# Altium PCB Test.PcbDoc (part 2 of 3)
Units mil, origin at the board's own origin, x right, y up, seen from the top; angles counter-clockwise.
Board outline 6000 x 4000 mil, 2 copper layers (Top Layer, Bottom Layer); 135 components, 102 nets, 575 pads, 1 vias.
Unrouted connection lines stored in the file: 317.
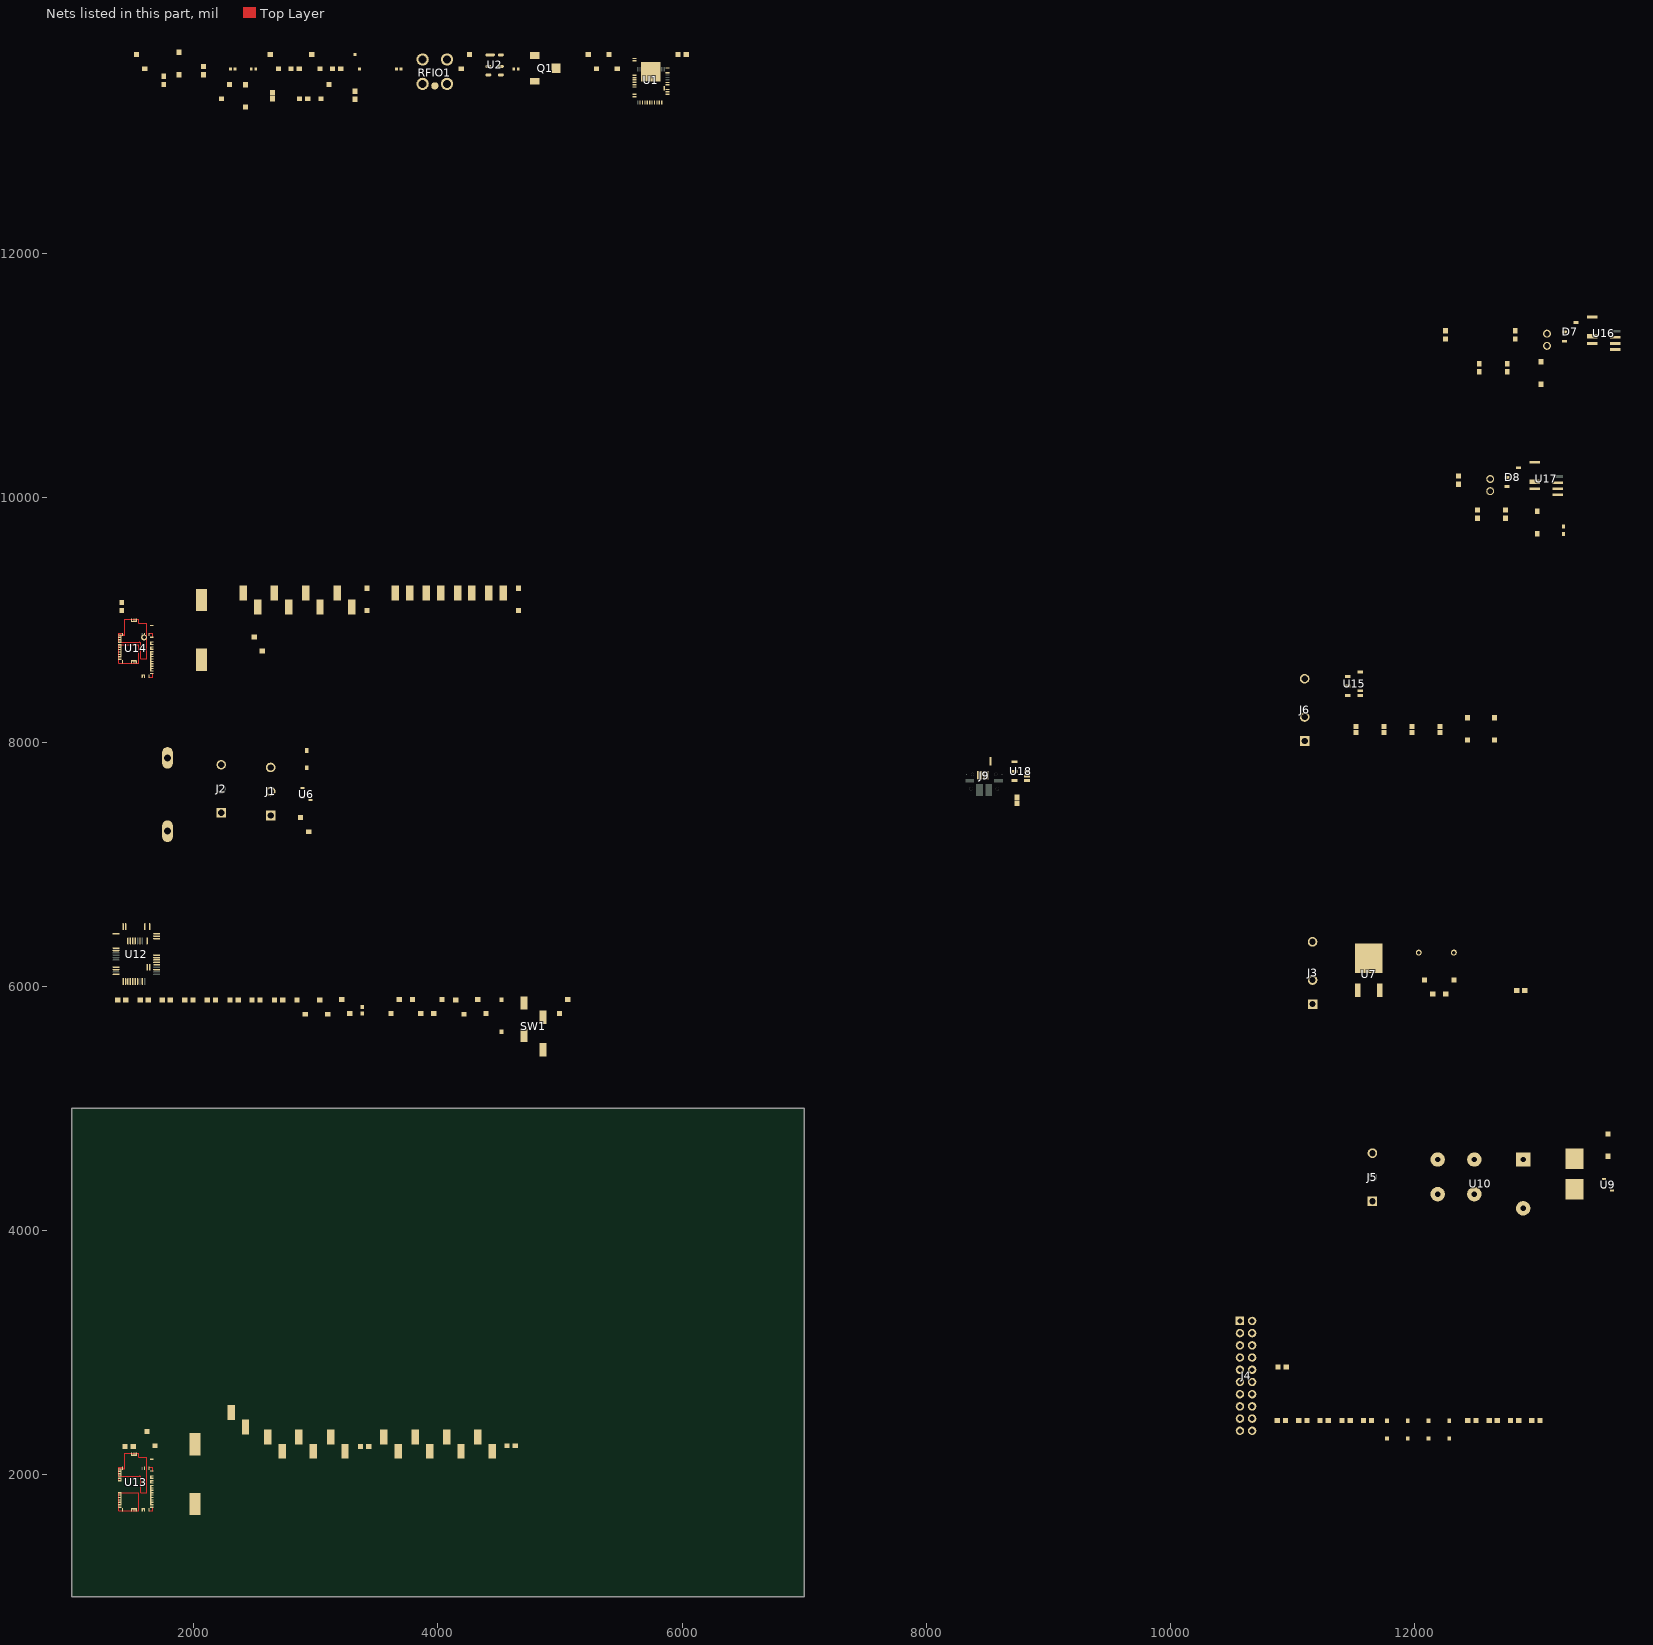
[diagram p2: the nets of this part, all layers, seen from the top]

## Part data
C1 C2 C14 C20 C21 C22 C23: Capacitance=1uF, Case/Package=0603, Case Code (Metric)=1608, Dielectric=X5R, Manufacturer=Murata, Manufacturer Part Number=GRM188R61A105KA61J, Max Operating Temperature=85°C, Min Operating Temperature=-55°C, Package Quantity=1, Supplier Part Number 1=GRM188R61A105KA61J-ND, Tolerance=10%, Voltage Rating=10V, Case Code (Imperial)=0603, ComponentLink1Description=https://datasheet.ciiva.com/6270/product-6270752.pdf, ComponentLink1URL=https://datasheet.ciiva.com/6270/product-6270752.pdf, ComponentLink2Description=https://datasheet.ciiva.com/6270/partnumbering-e-01-6270748.pdf, ComponentLink2URL=https://datasheet.ciiva.com/6270/partnumbering-e-01-6270748.pdf, ComponentLink3Description=https://datasheet.ciiva.com/6270/partnumbering-e-01-6270750.pdf, ComponentLink3URL=https://datasheet.ciiva.com/6270/partnumbering-e-01-6270750.pdf, Depth=0.8mm, Height=0.8mm, Length=1.6mm, Mount="Surface Mount", Packaging="Tape and Reel", Pricing 1="30000=0.0118 (USD)", Radiation Hardening=No, REACH SVHC="No SVHC", Stock 1=0, Supplier 1=Digi-Key, Termination=SMD/SMT, Thickness=0.035inch, Voltage Rating (DC)=10V, Width=0.031inch
C3: Capacitance=220nF, Case/Package=0603, Case Code (Metric)=1608, Dielectric=X7R, Manufacturer=Murata, Manufacturer Part Number=GRM188R71E224KA88D, Max Operating Temperature=125°C, Min Operating Temperature=-55°C, Package Quantity=1, Supplier Part Number 1=490-3290-2-ND, Tolerance=10%, Voltage=50V, Voltage Rating=25V, Case Code (Imperial)=0603, ComponentLink1Description=https://datasheet.ciiva.com/5411/product-5411362.pdf, ComponentLink1URL=https://datasheet.ciiva.com/5411/product-5411362.pdf, ComponentLink2Description=https://datasheet.ciiva.com/11786/0900766b807a1cab-11786308.pdf, ComponentLink2URL=https://datasheet.ciiva.com/11786/0900766b807a1cab-11786308.pdf, ComponentLink3Description=https://datasheet.ciiva.com/14116/nmgrm-data-en-14116629.pdf, ComponentLink3URL=https://datasheet.ciiva.com/14116/nmgrm-data-en-14116629.pdf, ComponentLink4Description=https://datasheet.ciiva.com/3777/1531grm188r71e224ka8823-3777688.pdf, ComponentLink4URL=https://datasheet.ciiva.com/3777/1531grm188r71e224ka8823-3777688.pdf, ComponentLink5Description=https://datasheet.ciiva.com/6068/1784408-6068393.pdf, ComponentLink5URL=https://datasheet.ciiva.com/6068/1784408-6068393.pdf, ComponentLink6Description=https://datasheet.ciiva.com/16425/product-16425866.pdf, ComponentLink6URL=https://datasheet.ciiva.com/16425/product-16425866.pdf, ComponentLink7Description=https://datasheet.ciiva.com/22703/1784408-22703338.pdf, ComponentLink7URL=https://datasheet.ciiva.com/22703/1784408-22703338.pdf, ComponentLink8Description=https://datasheet.ciiva.com/133/grm188r71e224ka88-01-133883.pdf, ComponentLink8URL=https://datasheet.ciiva.com/133/grm188r71e224ka88-01-133883.pdf, ComponentLink9Description=https://datasheet.ciiva.com/133/grm188r71e224ka88-01-133884.pdf, ComponentLink9URL=https://datasheet.ciiva.com/133/grm188r71e224ka88-01-133884.pdf, ComponentLink10Description=https://datasheet.ciiva.com/7937/1784408-7937645.pdf, ComponentLink10URL=https://datasheet.ciiva.com/7937/1784408-7937645.pdf, ComponentLink11Description=https://datasheet.ciiva.com/48436/nmgrm-data-en-48436687.pdf, ComponentLink11URL=https://datasheet.ciiva.com/48436/nmgrm-data-en-48436687.pdf, ComponentLink12Description=https://datasheet.ciiva.com/29202/451619-da-01-en-vs-kondensator-0603-29202002.pdf, ComponentLink12URL=https://datasheet.ciiva.com/29202/451619-da-01-en-vs-kondensator-0603-29202002.pdf, Depth=0.8mm, Height=0.8mm, Lead Free="Lead Free", Length=1.6mm, Material=Ceramic, Mount="Surface Mount", Number of Pins=2, Packaging="Tape and Reel", Pricing 1="4000=0.02634 (USD)", Radiation Hardening=No, REACH SVHC="No SVHC", Stock 1=0, Supplier 1=Digi-Key, Termination=SMD/SMT, Thickness=0.035inch, Voltage Rating (DC)=25V, Width=0.8mm
C5: Capacitance=22pF, Case/Package=0603, Case Code (Metric)=1608, Dielectric=C0G, Dielectric Material=Ceramic, Insulation Resistance=10GR, Manufacturer=Murata, Manufacturer Part Number=GRM1885C1H220JA01D, Max Operating Temperature=125°C, Min Operating Temperature=-55°C, Package Quantity=1, Supplier Part Number 1=490-1411-2-ND, Temperature Coefficient=30ppm/°C, Tolerance=10%, Voltage=50V, Case Code (Imperial)=0603, ComponentLink1Description=https://datasheet.ciiva.com/131/product-131760.pdf, ComponentLink1URL=https://datasheet.ciiva.com/131/product-131760.pdf, ComponentLink2Description=https://datasheet.ciiva.com/131/partnumbering-e-01-131761.pdf, ComponentLink2URL=https://datasheet.ciiva.com/131/partnumbering-e-01-131761.pdf, ComponentLink3Description=https://datasheet.ciiva.com/14116/grmseries-tc-hitype-eng-14116853.pdf, ComponentLink3URL=https://datasheet.ciiva.com/14116/grmseries-tc-hitype-eng-14116853.pdf, ComponentLink4Description=https://datasheet.ciiva.com/3776/1156grm1885c1h220ja0123-3776984.pdf, ComponentLink4URL=https://datasheet.ciiva.com/3776/1156grm1885c1h220ja0123-3776984.pdf, ComponentLink5Description=https://datasheet.ciiva.com/14116/grmseries-tc-hitype-eng-14116826.pdf, ComponentLink5URL=https://datasheet.ciiva.com/14116/grmseries-tc-hitype-eng-14116826.pdf, ComponentLink6Description=https://datasheet.ciiva.com/11786/0900766b807a1cab-11786398.pdf, ComponentLink6URL=https://datasheet.ciiva.com/11786/0900766b807a1cab-11786398.pdf, ComponentLink7Description=https://datasheet.ciiva.com/131/partnumbering-e-01-131759.pdf, ComponentLink7URL=https://datasheet.ciiva.com/131/partnumbering-e-01-131759.pdf, Depth=0.8mm, Height=0.8mm, Lead Free="Lead Free", Length=1.6mm, Material=Ceramic, Mount="Surface Mount", Number of Pins=2, Packaging="Tape and Reel", Pricing 1="4000=0.01466 (USD)", Radiation Hardening=No, REACH SVHC="No SVHC", Stock 1=0, Supplier 1=Digi-Key, Termination=SMD/SMT, Thickness=0.035inch, Voltage Rating=50V, Voltage Rating (DC)=50V, Width=0.031inch
C6: Capacitance=1.8pF, Case/Package=0603, Case Code (Metric)=1608, Dielectric=C0G, Manufacturer=Murata, Manufacturer Part Number=GRM1885C1H1R8CA01D, Max Operating Temperature=125°C, Min Operating Temperature=-55°C, Package Quantity=4000, Supplier Part Number 1=GRM1885C1H1R8CA01D-ND, Voltage=50V, Case Code (Imperial)=0603, ComponentLink1Description=https://datasheet.ciiva.com/15381/product-15381873.pdf, ComponentLink1URL=https://datasheet.ciiva.com/15381/product-15381873.pdf, ComponentLink2Description=https://datasheet.ciiva.com/29538/partnumbering-e-01-29538301.pdf, ComponentLink2URL=https://datasheet.ciiva.com/29538/partnumbering-e-01-29538301.pdf, ComponentLink3Description=https://datasheet.ciiva.com/41860/partnumbering-e-01-41860766.pdf, ComponentLink3URL=https://datasheet.ciiva.com/41860/partnumbering-e-01-41860766.pdf, Depth=0.8mm, Height=0.8mm, Lead Free="Lead Free", Lead Pitch=0.5mm, Length=1.6mm, Mount="Surface Mount", Packaging="Tape and Reel", Pricing 1="12000=0.0088 (USD)", REACH SVHC="No SVHC", Stock 1=0, Supplier 1=Digi-Key, Termination=SMD/SMT, Thickness=0.035inch, Voltage Rating=50V, Voltage Rating (DC)=50V, Width=0.8mm
C9: Capacitance=680pF, Case/Package=0603, Case Code (Metric)=1608, Dielectric=C0G, Dielectric Material=Ceramic, Insulation Resistance=10GR, Manufacturer=Murata, Manufacturer Part Number=GRM1885C1H681JA01D, Max Operating Temperature=125°C, Min Operating Temperature=-55°C, Package Quantity=1, Supplier Part Number 1=490-1447-2-ND, Temperature Coefficient=30ppm/°C, Tolerance=5%, Voltage=50V, Case Code (Imperial)=0603, ComponentLink1Description=https://datasheet.ciiva.com/132/product-132816.pdf, ComponentLink1URL=https://datasheet.ciiva.com/132/product-132816.pdf, ComponentLink2Description=https://datasheet.ciiva.com/18102/getdatasheetpartid-74199-18102533.pdf, ComponentLink2URL=https://datasheet.ciiva.com/18102/getdatasheetpartid-74199-18102533.pdf, ComponentLink3Description=https://datasheet.ciiva.com/11787/0900766b807a1cab-11787610.pdf, ComponentLink3URL=https://datasheet.ciiva.com/11787/0900766b807a1cab-11787610.pdf, ComponentLink4Description=https://datasheet.ciiva.com/5427/product-5427052.pdf, ComponentLink4URL=https://datasheet.ciiva.com/5427/product-5427052.pdf, ComponentLink5Description=https://datasheet.ciiva.com/16356/product-16356044.pdf, ComponentLink5URL=https://datasheet.ciiva.com/16356/product-16356044.pdf, ComponentLink6Description=https://datasheet.ciiva.com/132/partnumbering-e-01-132814.pdf, ComponentLink6URL=https://datasheet.ciiva.com/132/partnumbering-e-01-132814.pdf, ComponentLink7Description=https://datasheet.ciiva.com/6068/4360-6068366.pdf, ComponentLink7URL=https://datasheet.ciiva.com/6068/4360-6068366.pdf, ComponentLink8Description=https://datasheet.ciiva.com/132/partnumbering-e-01-132815.pdf, ComponentLink8URL=https://datasheet.ciiva.com/132/partnumbering-e-01-132815.pdf, ComponentLink9Description=https://datasheet.ciiva.com/29202/451105-da-01-en-vs-kondensator-0603-29202593.pdf, ComponentLink9URL=https://datasheet.ciiva.com/29202/451105-da-01-en-vs-kondensator-0603-29202593.pdf, Depth=0.8mm, Height=0.8mm, Lead Free="Lead Free", Length=1.6mm, Material=Ceramic, Mount="Surface Mount", Number of Pins=2, Packaging="Tape and Reel", Pricing 1="4000=0.02204 (USD)", Radiation Hardening=No, REACH SVHC="No SVHC", Stock 1=0, Supplier 1=Digi-Key, Termination=SMD/SMT, Thickness=0.035inch, Voltage Rating=50V, Voltage Rating (DC)=50V, Width=0.031inch
C10: Capacitance=47nF, Case/Package=0603, Case Code (Metric)=1608, Dielectric=X7R, Dielectric Material=Ceramic, Insulation Resistance=10GR, Manufacturer=Murata, Manufacturer Part Number=GRM188R71H473KA61D, Max Operating Temperature=125°C, Min Operating Temperature=-55°C, Package Quantity=1, Supplier Part Number 1=490-3287-6-ND, Tolerance=10%, Voltage=50V, Case Code (Imperial)=0603, ComponentLink1Description=https://datasheet.ciiva.com/7937/4360-7937672.pdf, ComponentLink1URL=https://datasheet.ciiva.com/7937/4360-7937672.pdf, ComponentLink2Description=https://datasheet.ciiva.com/14116/nmgrm-data-en-14116600.pdf, ComponentLink2URL=https://datasheet.ciiva.com/14116/nmgrm-data-en-14116600.pdf, ComponentLink3Description=https://datasheet.ciiva.com/7937/4360-7937673.pdf, ComponentLink3URL=https://datasheet.ciiva.com/7937/4360-7937673.pdf, ComponentLink4Description=https://datasheet.ciiva.com/48436/nmgrm-data-en-48436665.pdf, ComponentLink4URL=https://datasheet.ciiva.com/48436/nmgrm-data-en-48436665.pdf, ComponentLink5Description=https://datasheet.ciiva.com/7937/4360-7937674.pdf, ComponentLink5URL=https://datasheet.ciiva.com/7937/4360-7937674.pdf, ComponentLink6Description=https://datasheet.ciiva.com/132/grm188r71h473ka61-01-132379.pdf, ComponentLink6URL=https://datasheet.ciiva.com/132/grm188r71h473ka61-01-132379.pdf, ComponentLink7Description=https://datasheet.ciiva.com/132/grm188r71h473ka61-01-132380.pdf, ComponentLink7URL=https://datasheet.ciiva.com/132/grm188r71h473ka61-01-132380.pdf, ComponentLink8Description=https://datasheet.ciiva.com/5427/product-5427340.pdf, ComponentLink8URL=https://datasheet.ciiva.com/5427/product-5427340.pdf, ComponentLink9Description=https://datasheet.ciiva.com/11786/0900766b807a1cab-11786316.pdf, ComponentLink9URL=https://datasheet.ciiva.com/11786/0900766b807a1cab-11786316.pdf, ComponentLink10Description=https://datasheet.ciiva.com/16393/product-16393388.pdf, ComponentLink10URL=https://datasheet.ciiva.com/16393/product-16393388.pdf, ComponentLink11Description=https://datasheet.ciiva.com/132/grm188r71h473ka61-01-132381.pdf, ComponentLink11URL=https://datasheet.ciiva.com/132/grm188r71h473ka61-01-132381.pdf, ComponentLink12Description=https://datasheet.ciiva.com/18101/getdatasheetpartid-38124-18101149.pdf, ComponentLink12URL=https://datasheet.ciiva.com/18101/getdatasheetpartid-38124-18101149.pdf, ComponentLink13Description=https://datasheet.ciiva.com/29201/451904-da-01-en-vs-kondensator-0603-29201838.pdf, ComponentLink13URL=https://datasheet.ciiva.com/29201/451904-da-01-en-vs-kondensator-0603-29201838.pdf, Depth=0.8mm, Height=0.8mm, Lead Free="Lead Free", Length=1.6mm, Material=Ceramic, Mount="Surface Mount", Number of Pins=2, Packaging="Tape and Reel", Pricing 1="1=0.16, 10=0.114, 100=0.0538, 500=0.0377, 1000=0.03122 (USD)", Radiation Hardening=No, REACH SVHC="No SVHC", Stock 1=943, Supplier 1=Digi-Key, Termination=SMD/SMT, Thickness=0.035inch, Voltage Rating=50V, Voltage Rating (DC)=50V, Width=0.031inch
C11 C13 C15 C16 C17 C18 C19 C45 C49 C51: Capacitance=100nF, Case/Package=0603, Case Code (Metric)=1608, Dielectric=X7R, Dielectric Material=Ceramic, Insulation Resistance=10GR, Manufacturer=Murata, Manufacturer Part Number=GRM188R71H104KA93D, Max Operating Temperature=125°C, Min Operating Temperature=-55°C, Package Quantity=1, Supplier Part Number 1=490-1519-6-ND, Tolerance=10%, Voltage=50V, Case Code (Imperial)=0603, ComponentLink1Description=https://datasheet.ciiva.com/19467/1857604-19467681.pdf, ComponentLink1URL=https://datasheet.ciiva.com/19467/1857604-19467681.pdf, ComponentLink2Description=https://datasheet.ciiva.com/28534/4360-28534245.pdf, ComponentLink2URL=https://datasheet.ciiva.com/28534/4360-28534245.pdf, ComponentLink3Description=https://datasheet.ciiva.com/26915/getdatasheetpartid-89095-26915384.pdf, ComponentLink3URL=https://datasheet.ciiva.com/26915/getdatasheetpartid-89095-26915384.pdf, ComponentLink4Description=https://datasheet.ciiva.com/131/partnumbering-e-01-131738.pdf, ComponentLink4URL=https://datasheet.ciiva.com/131/partnumbering-e-01-131738.pdf, ComponentLink5Description=https://datasheet.ciiva.com/7937/1747470-7937658.pdf, ComponentLink5URL=https://datasheet.ciiva.com/7937/1747470-7937658.pdf, ComponentLink6Description=https://datasheet.ciiva.com/14116/nmgrm-data-en-14116602.pdf, ComponentLink6URL=https://datasheet.ciiva.com/14116/nmgrm-data-en-14116602.pdf, ComponentLink7Description=https://datasheet.ciiva.com/131/partnumbering-e-01-131739.pdf, ComponentLink7URL=https://datasheet.ciiva.com/131/partnumbering-e-01-131739.pdf, ComponentLink8Description=https://datasheet.ciiva.com/7937/4360-7937659.pdf, ComponentLink8URL=https://datasheet.ciiva.com/7937/4360-7937659.pdf, ComponentLink9Description=https://datasheet.ciiva.com/48436/nmgrm-data-en-48436667.pdf, ComponentLink9URL=https://datasheet.ciiva.com/48436/nmgrm-data-en-48436667.pdf, ComponentLink10Description=https://datasheet.ciiva.com/131/partnumbering-e-01-131740.pdf, ComponentLink10URL=https://datasheet.ciiva.com/131/partnumbering-e-01-131740.pdf, ComponentLink11Description=https://datasheet.ciiva.com/11786/0900766b807a1cab-11786047.pdf, ComponentLink11URL=https://datasheet.ciiva.com/11786/0900766b807a1cab-11786047.pdf, ComponentLink12Description=https://datasheet.ciiva.com/29201/451744-da-01-en-vs-kondensator-0603-29201904.pdf, ComponentLink12URL=https://datasheet.ciiva.com/29201/451744-da-01-en-vs-kondensator-0603-29201904.pdf, Contact Plating=Tin,Matte, Depth=0.8mm, Height=0.8mm, Lead Free="Lead Free", Length=1.6mm, Material=Ceramic, Mount="Surface Mount", Number of Pins=2, Packaging="Tape and Reel", Pricing 1="1=0.12, 10=0.084, 100=0.0396, 500=0.02778, 1000=0.023 (USD)", Radiation Hardening=No, REACH SVHC="No SVHC", Stock 1=0, Supplier 1=Digi-Key, Termination=SMD/SMT, Thickness=0.035inch, Voltage Rating=50V, Voltage Rating (DC)=50V, Width=0.8mm
C12 C44: Capacitance=10nF, Case/Package=0603, Case Code (Metric)=1608, Dielectric=X7R, Dielectric Material=Ceramic, Insulation Resistance=10GR, Manufacturer=Murata, Manufacturer Part Number=GRM188R71H103KA01D, Max Operating Temperature=125°C, Min Operating Temperature=-55°C, Package Quantity=1, Supplier Part Number 1=490-1512-1-ND, Tolerance=10%, Voltage=50V, Case Code (Imperial)=0603, ComponentLink1Description=https://datasheet.ciiva.com/129/product-129872.pdf, ComponentLink1URL=https://datasheet.ciiva.com/129/product-129872.pdf, ComponentLink2Description=https://datasheet.ciiva.com/11786/0900766b8003061f-11786516.pdf, ComponentLink2URL=https://datasheet.ciiva.com/11786/0900766b8003061f-11786516.pdf, ComponentLink3Description=https://datasheet.ciiva.com/7937/4360-7937654.pdf, ComponentLink3URL=https://datasheet.ciiva.com/7937/4360-7937654.pdf, ComponentLink4Description=https://datasheet.ciiva.com/7937/1747461-7937655.pdf, ComponentLink4URL=https://datasheet.ciiva.com/7937/1747461-7937655.pdf, ComponentLink5Description=https://datasheet.ciiva.com/7937/1747461-7937656.pdf, ComponentLink5URL=https://datasheet.ciiva.com/7937/1747461-7937656.pdf, ComponentLink6Description=https://datasheet.ciiva.com/28534/1769893-28534235.pdf, ComponentLink6URL=https://datasheet.ciiva.com/28534/1769893-28534235.pdf, ComponentLink7Description=https://datasheet.ciiva.com/129/partnumbering-e-01-129870.pdf, ComponentLink7URL=https://datasheet.ciiva.com/129/partnumbering-e-01-129870.pdf, ComponentLink8Description=https://datasheet.ciiva.com/48428/nmgrm-data-en-48428590.pdf, ComponentLink8URL=https://datasheet.ciiva.com/48428/nmgrm-data-en-48428590.pdf, ComponentLink9Description=https://datasheet.ciiva.com/129/partnumbering-e-01-129871.pdf, ComponentLink9URL=https://datasheet.ciiva.com/129/partnumbering-e-01-129871.pdf, ComponentLink10Description=https://datasheet.ciiva.com/48428/nmgrm-data-en-48428591.pdf, ComponentLink10URL=https://datasheet.ciiva.com/48428/nmgrm-data-en-48428591.pdf, ComponentLink11Description=https://datasheet.ciiva.com/29202/451715-da-01-en-vs-kondensator-0603-29202047.pdf, ComponentLink11URL=https://datasheet.ciiva.com/29202/451715-da-01-en-vs-kondensator-0603-29202047.pdf, Depth=0.8mm, Height=0.8mm, Lead Free="Lead Free", Length=1.6mm, Material=Ceramic, Mount="Surface Mount", Number of Pins=2, Packaging="Tape and Reel", Pricing 1="1=0.1, 10=0.06, 100=0.0266, 500=0.019 (USD)", REACH SVHC=Unknown, Stock 1=0, Supplier 1=Digi-Key, Termination=SMD/SMT, Thickness=0.035inch, Voltage Rating=50V, Voltage Rating (DC)=50V, Width=0.031inch
C24 C34: Capacitance=100uF, Case/Package=Radial, ESR (Equivalent Series Resistance)=28mR, Leakage Current=50uA, Manufacturer=Panasonic, Manufacturer Part Number=EEH-ZA1H101P, Max Operating Temperature=105°C, Min Operating Temperature=-55°C, Package Quantity=500, Ripple Current=2A, Supplier Part Number 1=P15442TR-ND, Tolerance=20%, Voltage=50V, ComponentLink1Description=https://datasheet.ciiva.com/48541/eehza-eng-tds-48541031.pdf, ComponentLink1URL=https://datasheet.ciiva.com/48541/eehza-eng-tds-48541031.pdf, ComponentLink2Description=https://datasheet.ciiva.com/18524/aba0000ce136-18524922.pdf, ComponentLink2URL=https://datasheet.ciiva.com/18524/aba0000ce136-18524922.pdf, ComponentLink3Description=https://datasheet.ciiva.com/6134/1536543-6134363.pdf, ComponentLink3URL=https://datasheet.ciiva.com/6134/1536543-6134363.pdf, ComponentLink4Description=https://datasheet.ciiva.com/7794/1536543-7794235.pdf, ComponentLink4URL=https://datasheet.ciiva.com/7794/1536543-7794235.pdf, ComponentLink5Description=https://datasheet.ciiva.com/18524/aba0000ce136-18524923.pdf, ComponentLink5URL=https://datasheet.ciiva.com/18524/aba0000ce136-18524923.pdf, ComponentLink6Description=https://datasheet.ciiva.com/30178/86aba0000ce136-30178699.pdf, ComponentLink6URL=https://datasheet.ciiva.com/30178/86aba0000ce136-30178699.pdf, ComponentLink7Description=https://datasheet.ciiva.com/14595/70256916-14595260.pdf, ComponentLink7URL=https://datasheet.ciiva.com/14595/70256916-14595260.pdf, ComponentLink8Description=https://datasheet.ciiva.com/18524/aba0000ce136-18524924.pdf, ComponentLink8URL=https://datasheet.ciiva.com/18524/aba0000ce136-18524924.pdf, ComponentLink9Description=https://datasheet.ciiva.com/28691/1536543-28691421.pdf, ComponentLink9URL=https://datasheet.ciiva.com/28691/1536543-28691421.pdf, ComponentLink10Description=https://datasheet.ciiva.com/22730/1536543-22730558.pdf, ComponentLink10URL=https://datasheet.ciiva.com/22730/1536543-22730558.pdf, ComponentLink11Description=https://datasheet.ciiva.com/10327/aba0000ce136-10327231.pdf, ComponentLink11URL=https://datasheet.ciiva.com/10327/aba0000ce136-10327231.pdf, Diameter=10mm, Height=10.2mm, Height - Seated (Max)=0.413inch, Lead Diameter=0.9mm, Lead Free="Lead Free", Lead Pitch=4.6mm, Length=10.2mm, Life (Hours)=10000Hour, Material=Polymer, Mount="Surface Mount,PCB", Packaging="Tape and Reel", Polarity=Polar, Pricing 1="500=1.20086, 1000=1.05076, 2500=1.01323, 5000=0.9757 (USD)", Radiation Hardening=No, REACH SVHC="No SVHC", Ripple Current (AC)=2A, Stock 1=21500, Supplier 1=Digi-Key, Termination=SMD/SMT, Voltage Rating=50V, Voltage Rating (DC)=50V
C25 C26 C35 C36: Capacitance=10uF, Case/Package=1210, Case Code (Metric)=3225, Dielectric=X7R, Manufacturer=Murata, Manufacturer Part Number=GRM32ER71H106KA12L, Max Operating Temperature=125°C, Min Operating Temperature=-55°C, Package Quantity=1000, Supplier Part Number 1=GRM32ER71H106KA12L-ND, Tolerance=10%, Voltage=50V, Case Code (Imperial)=1210, ComponentLink1Description=https://datasheet.ciiva.com/16497/product-16497010.pdf, ComponentLink1URL=https://datasheet.ciiva.com/16497/product-16497010.pdf, ComponentLink2Description=https://datasheet.ciiva.com/6270/partnumbering-e-01-6270167.pdf, ComponentLink2URL=https://datasheet.ciiva.com/6270/partnumbering-e-01-6270167.pdf, ComponentLink3Description=https://datasheet.ciiva.com/6270/partnumbering-e-01-6270168.pdf, ComponentLink3URL=https://datasheet.ciiva.com/6270/partnumbering-e-01-6270168.pdf, ComponentLink4Description=https://datasheet.ciiva.com/6270/partnumbering-e-01-6270169.pdf, ComponentLink4URL=https://datasheet.ciiva.com/6270/partnumbering-e-01-6270169.pdf, ComponentLink5Description=https://datasheet.ciiva.com/11789/0900766b80ef921d-11789081.pdf, ComponentLink5URL=https://datasheet.ciiva.com/11789/0900766b80ef921d-11789081.pdf, ComponentLink6Description=https://datasheet.ciiva.com/3777/4286grm32er71h106ka1223-3777306.pdf, ComponentLink6URL=https://datasheet.ciiva.com/3777/4286grm32er71h106ka1223-3777306.pdf, ComponentLink7Description=https://datasheet.ciiva.com/11607/c02e-11607596.pdf, ComponentLink7URL=https://datasheet.ciiva.com/11607/c02e-11607596.pdf, ComponentLink8Description=https://datasheet.ciiva.com/46441/1754714-46441340.pdf, ComponentLink8URL=https://datasheet.ciiva.com/46441/1754714-46441340.pdf, ComponentLink9Description=https://datasheet.ciiva.com/2989/c02e-2989823.pdf, ComponentLink9URL=https://datasheet.ciiva.com/2989/c02e-2989823.pdf, Depth=2.5mm, Height=2.5mm, Lead Free="Lead Free", Length=3.2mm, Material=Ceramic, Mount="Surface Mount", Packaging="Tape and Reel", Radiation Hardening=No, REACH SVHC="No SVHC", Stock 1=0, Supplier 1=Digi-Key, Termination=SMD/SMT, Thickness=0.106inch, Voltage Rating=50V, Voltage Rating (DC)=50V, Width=2.5mm
C27 C28 C37 C38: Capacitance=4.7uF, Case/Package=1210, Case Code (Metric)=3225, Dielectric=X7R, Manufacturer=Murata, Manufacturer Part Number=GRM32ER71H475KA88L, Max Operating Temperature=125°C, Min Operating Temperature=-55°C, Package Quantity=1, Tolerance=10%, Voltage=50V, Case Code (Imperial)=1210, ComponentLink1Description=https://datasheet.ciiva.com/7937/1747494-7937780.pdf, ComponentLink1URL=https://datasheet.ciiva.com/7937/1747494-7937780.pdf, ComponentLink2Description=https://datasheet.ciiva.com/11786/0900766b806042af-11786805.pdf, ComponentLink2URL=https://datasheet.ciiva.com/11786/0900766b806042af-11786805.pdf, ComponentLink3Description=https://datasheet.ciiva.com/22703/1747494-22703399.pdf, ComponentLink3URL=https://datasheet.ciiva.com/22703/1747494-22703399.pdf, ComponentLink4Description=https://datasheet.ciiva.com/48436/grm32er71h475ka88l-eng-tds-48436715.pdf, ComponentLink4URL=https://datasheet.ciiva.com/48436/grm32er71h475ka88l-eng-tds-48436715.pdf, ComponentLink5Description=https://datasheet.ciiva.com/18101/getdatasheetpartid-55823-18101548.pdf, ComponentLink5URL=https://datasheet.ciiva.com/18101/getdatasheetpartid-55823-18101548.pdf, ComponentLink6Description=https://datasheet.ciiva.com/142/partnumbering-e-01-142157.pdf, ComponentLink6URL=https://datasheet.ciiva.com/142/partnumbering-e-01-142157.pdf, ComponentLink7Description=https://datasheet.ciiva.com/142/partnumbering-e-01-142158.pdf, ComponentLink7URL=https://datasheet.ciiva.com/142/partnumbering-e-01-142158.pdf, ComponentLink8Description=https://datasheet.ciiva.com/142/partnumbering-e-01-142159.pdf, ComponentLink8URL=https://datasheet.ciiva.com/142/partnumbering-e-01-142159.pdf, ComponentLink9Description=https://datasheet.ciiva.com/16199/product-16199503.pdf, ComponentLink9URL=https://datasheet.ciiva.com/16199/product-16199503.pdf, Depth=2.5mm, Height=2.5mm, Lead Free="Lead Free", Length=3.2mm, Mount="Surface Mount", Number of Pins=2, Packaging="Tape and Reel", Radiation Hardening=No, REACH SVHC="No SVHC", Stock 1=0, Supplier 1="Future Electronics", Supplier Part Number 1=GRM32ER71H475KA88L, Termination=SMD/SMT, Thickness=0.106inch, Voltage Rating=50V, Voltage Rating (DC)=50V, Width=0.098inch
C29: Capacitance=100pF, Case/Package=0603, Case Code (Metric)=1608, Dielectric=C0G, Dielectric Material=Ceramic, Insulation Resistance=10GR, Manufacturer=Murata, Manufacturer Part Number=GRM1885C1H101JA01D, Max Operating Temperature=125°C, Min Operating Temperature=-55°C, Package Quantity=1, Supplier Part Number 1=490-1427-2-ND, Temperature Coefficient=30ppm/°C, Tolerance=5%, Voltage=50V, Case Code (Imperial)=0603, ComponentLink1Description=https://datasheet.ciiva.com/131/product-131088.pdf, ComponentLink1URL=https://datasheet.ciiva.com/131/product-131088.pdf, ComponentLink2Description=https://datasheet.ciiva.com/3777/grm1885c1h101ja0123-3777264.pdf, ComponentLink2URL=https://datasheet.ciiva.com/3777/grm1885c1h101ja0123-3777264.pdf, ComponentLink3Description=https://datasheet.ciiva.com/131/partnumbering-e-01-131089.pdf, ComponentLink3URL=https://datasheet.ciiva.com/131/partnumbering-e-01-131089.pdf, ComponentLink4Description=https://datasheet.ciiva.com/18100/getdatasheetpartid-26823-18100641.pdf, ComponentLink4URL=https://datasheet.ciiva.com/18100/getdatasheetpartid-26823-18100641.pdf, ComponentLink5Description=https://datasheet.ciiva.com/11605/c02e-11605557.pdf, ComponentLink5URL=https://datasheet.ciiva.com/11605/c02e-11605557.pdf, ComponentLink6Description=https://datasheet.ciiva.com/28556/4360-28556551.pdf, ComponentLink6URL=https://datasheet.ciiva.com/28556/4360-28556551.pdf, ComponentLink7Description=https://datasheet.ciiva.com/7828/4360-7828889.pdf, ComponentLink7URL=https://datasheet.ciiva.com/7828/4360-7828889.pdf, ComponentLink8Description=https://datasheet.ciiva.com/7828/4360-7828890.pdf, ComponentLink8URL=https://datasheet.ciiva.com/7828/4360-7828890.pdf, ComponentLink9Description=https://datasheet.ciiva.com/7828/4360-7828891.pdf, ComponentLink9URL=https://datasheet.ciiva.com/7828/4360-7828891.pdf, ComponentLink10Description=https://datasheet.ciiva.com/14116/grmseries-tc-hitype-eng-14116828.pdf, ComponentLink10URL=https://datasheet.ciiva.com/14116/grmseries-tc-hitype-eng-14116828.pdf, ComponentLink11Description=https://datasheet.ciiva.com/16291/product-16291613.pdf, ComponentLink11URL=https://datasheet.ciiva.com/16291/product-16291613.pdf, ComponentLink12Description=https://datasheet.ciiva.com/131/partnumbering-e-01-131087.pdf, ComponentLink12URL=https://datasheet.ciiva.com/131/partnumbering-e-01-131087.pdf, ComponentLink13Description=https://datasheet.ciiva.com/14116/grmseries-tc-hitype-eng-14116815.pdf, ComponentLink13URL=https://datasheet.ciiva.com/14116/grmseries-tc-hitype-eng-14116815.pdf, ComponentLink14Description=https://datasheet.ciiva.com/29149/450134-da-01-en-vs-kondensator-0603-29149008.pdf, ComponentLink14URL=https://datasheet.ciiva.com/29149/450134-da-01-en-vs-kondensator-0603-29149008.pdf, Depth=0.8mm, Height=0.8mm, Lead Free="Lead Free", Length=1.6mm, Material=Ceramic, Mount="Surface Mount", Number of Pins=2, Packaging="Tape and Reel", Pricing 1="4000=0.01524 (USD)", Radiation Hardening=No, REACH SVHC=Unknown, Stock 1=0, Supplier 1=Digi-Key, Termination=SMD/SMT, Thickness=0.035inch, Voltage Rating=50V, Voltage Rating (DC)=50V, Weight=7.1E-05oz, Width=0.031inch
C30 C31 C32 C33 C40 C41 C42: Capacitance=22uF, Case/Package=1210, Case Code (Metric)=3225, Dielectric=X7R, Manufacturer=Murata, Manufacturer Part Number=GRM32ER71E226KE15L, Max Operating Temperature=125°C, Min Operating Temperature=-55°C, Package Quantity=1, Supplier Part Number 1=490-5313-2-ND, Tolerance=10%, Voltage=25V, Case Code (Imperial)=1210, ComponentLink1Description=https://datasheet.ciiva.com/6072/1697714-6072768.pdf, ComponentLink1URL=https://datasheet.ciiva.com/6072/1697714-6072768.pdf, ComponentLink2Description=https://datasheet.ciiva.com/16497/product-16497009.pdf, ComponentLink2URL=https://datasheet.ciiva.com/16497/product-16497009.pdf, ComponentLink3Description=https://datasheet.ciiva.com/175/partnumbering-e-01-175746.pdf, ComponentLink3URL=https://datasheet.ciiva.com/175/partnumbering-e-01-175746.pdf, ComponentLink4Description=https://datasheet.ciiva.com/175/partnumbering-e-01-175747.pdf, ComponentLink4URL=https://datasheet.ciiva.com/175/partnumbering-e-01-175747.pdf, ComponentLink5Description=https://datasheet.ciiva.com/175/partnumbering-e-01-175748.pdf, ComponentLink5URL=https://datasheet.ciiva.com/175/partnumbering-e-01-175748.pdf, ComponentLink6Description=https://datasheet.ciiva.com/3776/2741grm32er71e226ke1523-3776996.pdf, ComponentLink6URL=https://datasheet.ciiva.com/3776/2741grm32er71e226ke1523-3776996.pdf, ComponentLink7Description=https://datasheet.ciiva.com/22703/1697714-22703397.pdf, ComponentLink7URL=https://datasheet.ciiva.com/22703/1697714-22703397.pdf, ComponentLink8Description=https://datasheet.ciiva.com/11789/0900766b80ef921d-11789129.pdf, ComponentLink8URL=https://datasheet.ciiva.com/11789/0900766b80ef921d-11789129.pdf, ComponentLink9Description=https://datasheet.ciiva.com/29201/451826-da-01-de-vs-kondens-grm32-er71e-226ke15l-29201795.pdf, ComponentLink9URL=https://datasheet.ciiva.com/29201/451826-da-01-de-vs-kondens-grm32-er71e-226ke15l-29201795.pdf, Depth=2.5mm, Height=2.5mm, Lead Free="Lead Free", Length=3.2mm, Material=Ceramic, Mount="Surface Mount", Number of Pins=2, Packaging="Tape and Reel", Pricing 1="1000=0.29 (USD)", Radiation Hardening=No, REACH SVHC="No SVHC", Stock 1=0, Supplier 1=Digi-Key, Termination=SMD/SMT, Thickness=0.106inch, Voltage Rating=25V, Voltage Rating (DC)=25V, Width=0.098inch
C39: Capacitance=150pF, Case/Package=0603, Case Code (Metric)=1608, Dielectric=C0G, Dielectric Material=Ceramic, Insulation Resistance=10GR, Manufacturer=Murata, Manufacturer Part Number=GRM1885C1H151JA01D, Max Operating Temperature=125°C, Min Operating Temperature=-55°C, Package Quantity=1, Supplier Part Number 1=490-1431-2-ND, Temperature Coefficient=30ppm/°C, Tolerance=5%, Voltage=50V, Case Code (Imperial)=0603, ComponentLink1Description=https://datasheet.ciiva.com/18100/getdatasheetpartid-31970-18100850.pdf, ComponentLink1URL=https://datasheet.ciiva.com/18100/getdatasheetpartid-31970-18100850.pdf, ComponentLink2Description=https://datasheet.ciiva.com/7828/4360-7828901.pdf, ComponentLink2URL=https://datasheet.ciiva.com/7828/4360-7828901.pdf, ComponentLink3Description=https://datasheet.ciiva.com/7828/4360-7828902.pdf, ComponentLink3URL=https://datasheet.ciiva.com/7828/4360-7828902.pdf, ComponentLink4Description=https://datasheet.ciiva.com/131/partnumbering-e-01-131975.pdf, ComponentLink4URL=https://datasheet.ciiva.com/131/partnumbering-e-01-131975.pdf, ComponentLink5Description=https://datasheet.ciiva.com/131/partnumbering-e-01-131976.pdf, ComponentLink5URL=https://datasheet.ciiva.com/131/partnumbering-e-01-131976.pdf, ComponentLink6Description=https://datasheet.ciiva.com/131/partnumbering-e-01-131977.pdf, ComponentLink6URL=https://datasheet.ciiva.com/131/partnumbering-e-01-131977.pdf, ComponentLink7Description=https://datasheet.ciiva.com/16214/product-16214654.pdf, ComponentLink7URL=https://datasheet.ciiva.com/16214/product-16214654.pdf, ComponentLink8Description=https://datasheet.ciiva.com/11787/0900766b808736db-11787103.pdf, ComponentLink8URL=https://datasheet.ciiva.com/11787/0900766b808736db-11787103.pdf, ComponentLink9Description=https://datasheet.ciiva.com/29241/450401-da-01-en-vs-kondensator-0603-29241818.pdf, ComponentLink9URL=https://datasheet.ciiva.com/29241/450401-da-01-en-vs-kondensator-0603-29241818.pdf, Depth=0.8mm, Height=0.8mm, Lead Free="Lead Free", Length=1.6mm, Material=Ceramic, Mount="Surface Mount", Number of Pins=2, Packaging="Tape and Reel", Pricing 1="4000=0.01668 (USD)", Radiation Hardening=No, REACH SVHC="No SVHC", Stock 1=0, Supplier 1=Digi-Key, Termination=SMD/SMT, Thickness=0.035inch, Voltage Rating=50V, Voltage Rating (DC)=50V, Width=0.8mm
C43: Capacitance=47uF, Case/Package=1210, Case Code (Metric)=3225, Dielectric=X5R, Manufacturer=Murata, Manufacturer Part Number=GRM32ER61C476KE15L, Max Operating Temperature=85°C, Min Operating Temperature=-55°C, Package Quantity=1, Supplier Part Number 1=GRM32ER61C476KE15L-ND, Tolerance=10%, Voltage=16V, Case Code (Imperial)=1210, ComponentLink1Description=https://datasheet.ciiva.com/5411/product-5411296.pdf, ComponentLink1URL=https://datasheet.ciiva.com/5411/product-5411296.pdf, ComponentLink2Description=https://datasheet.ciiva.com/6264/c02e-6264496.pdf, ComponentLink2URL=https://datasheet.ciiva.com/6264/c02e-6264496.pdf, ComponentLink3Description=https://datasheet.ciiva.com/16497/product-16497029.pdf, ComponentLink3URL=https://datasheet.ciiva.com/16497/product-16497029.pdf, ComponentLink4Description=https://datasheet.ciiva.com/16625/product-16625285.pdf, ComponentLink4URL=https://datasheet.ciiva.com/16625/product-16625285.pdf, ComponentLink5Description=https://datasheet.ciiva.com/6173/1747491-6173112.pdf, ComponentLink5URL=https://datasheet.ciiva.com/6173/1747491-6173112.pdf, ComponentLink6Description=https://datasheet.ciiva.com/6264/partnumbering-e-01-6264495.pdf, ComponentLink6URL=https://datasheet.ciiva.com/6264/partnumbering-e-01-6264495.pdf, ComponentLink7Description=https://datasheet.ciiva.com/29202/451184-da-01-de-vs-chip-kond-1210-47-0-uf-10pr-16-0v-x5r-29202483.pdf, ComponentLink7URL=https://datasheet.ciiva.com/29202/451184-da-01-de-vs-chip-kond-1210-47-0-uf-10pr-16-0v-x5r-29202483.pdf, ComponentLink8Description=https://datasheet.ciiva.com/29201/451871-da-01-de-vs-kondens-grm32-er61c-476ke15l-29201820.pdf, ComponentLink8URL=https://datasheet.ciiva.com/29201/451871-da-01-de-vs-kondens-grm32-er61c-476ke15l-29201820.pdf, Depth=2.5mm, Height=2.5mm, Lead Free="Lead Free", Length=3.2mm, Material=Ceramic, Mount="Surface Mount", Number of Pins=2, Packaging="Cut Tape", Radiation Hardening=No, REACH SVHC="No SVHC", Stock 1=0, Supplier 1=Digi-Key, Termination=SMD/SMT, Thickness=0.106inch, Voltage Rating=16V, Voltage Rating (DC)=16V, Width=0.098inch
D1: "LED; SMD; 0603; red; 18-54mcd; 1.6x0.8x0.55mm; 130°; 2÷2.4V; 20mA", Package="0603 Lite-On", Availability=Good, MF=Lite-On, MP=LTST-C191KRKT, Price="0.06 USD", SnapEDA_Link=https://www.snapeda.com/parts/LTST-C191KRKT/Lite-On/view-part/?ref=snap
D2 D3 D4 D5 D6: "DIODE Zener 5.1V 500mw", Breakdown Voltage=5.36V, Case/Package=SOD-123-2, Forward Voltage=900mV, Manufacturer="ON Semiconductor", Max Operating Temperature=150°C, Max Power Dissipation=500mW, Max Reverse Leakage Current=2uA, Min Operating Temperature=-55°C, Package Quantity=1, Test Current=5mA, Tolerance=5%, Voltage Rating (DC)=5.1V, Zener Current=10mA, ComponentLink1Description=https://datasheet.ciiva.com/895/mmsz2v4t1-d-895025.pdf, ComponentLink1URL=https://datasheet.ciiva.com/895/mmsz2v4t1-d-895025.pdf, ComponentLink2Description=https://datasheet.ciiva.com/895/mmsz2v4t1-d-895026.pdf, ComponentLink2URL=https://datasheet.ciiva.com/895/mmsz2v4t1-d-895026.pdf, ComponentLink3Description=https://datasheet.ciiva.com/895/mmsz2v4t1-d-895027.pdf, ComponentLink3URL=https://datasheet.ciiva.com/895/mmsz2v4t1-d-895027.pdf, ComponentLink4Description=https://datasheet.ciiva.com/15142/getdatasheetpartid-72078-15142387.pdf, ComponentLink4URL=https://datasheet.ciiva.com/15142/getdatasheetpartid-72078-15142387.pdf, ComponentLink5Description=https://datasheet.ciiva.com/8346/mmsz2v4t1-d-8346086.pdf, ComponentLink5URL=https://datasheet.ciiva.com/8346/mmsz2v4t1-d-8346086.pdf, ComponentLink6Description=https://datasheet.ciiva.com/8026/78656-8026888.pdf, ComponentLink6URL=https://datasheet.ciiva.com/8026/78656-8026888.pdf, ComponentLink7Description=https://datasheet.ciiva.com/26092/mmsz2v4t1-d-26092696.pdf, ComponentLink7URL=https://datasheet.ciiva.com/26092/mmsz2v4t1-d-26092696.pdf, ComponentLink8Description=https://datasheet.ciiva.com/16542/mmsz2v4t1-d-16542073.pdf, ComponentLink8URL=https://datasheet.ciiva.com/16542/mmsz2v4t1-d-16542073.pdf, ComponentLink9Description=https://datasheet.ciiva.com/8026/78656-8026890.pdf, ComponentLink9URL=https://datasheet.ciiva.com/8026/78656-8026890.pdf, Element Configuration=Single, Height=1.12mm, Impedance=60R, Lead Free="Lead Free", Length=2.69mm, Manufacturer Part Number=MMSZ5V1T1G, Material=Plastic, Number of Pins=2, Packaging="Tape and Reel", Peak Reverse Current=2uA, Power Dissipation=500mW, Power Rating=500mW, Radiation Hardening=No, REACH SVHC="No SVHC", Stock 1=0, Supplier 1="Future Electronics", Supplier Part Number 1=MMSZ5V1T1G, Voltage Tolerance=5%, Width=1.6mm, Working Voltage=5.1V, Zener Voltage=5.1V
FB1: Case/Package=0603, Case Code (Metric)=1608, Current Rating=500mA, DC Resistance (DCR)=380mR, Frequency=100MHz, Manufacturer=Murata, Manufacturer Part Number=BLM18AG601SN1D, Max Operating Temperature=125°C, Min Operating Temperature=-55°C, Package Quantity=1, Supplier Part Number 1=490-1014-2-ND, Tolerance=25%, Case Code (Imperial)=0603, ComponentLink1Description=https://datasheet.ciiva.com/1012/l0110s0100blm18a-1012017.pdf, ComponentLink1URL=https://datasheet.ciiva.com/1012/l0110s0100blm18a-1012017.pdf, ComponentLink2Description=https://datasheet.ciiva.com/1012/l0110s0100blm18a-1012018.pdf, ComponentLink2URL=https://datasheet.ciiva.com/1012/l0110s0100blm18a-1012018.pdf, ComponentLink3Description=https://datasheet.ciiva.com/1012/l0110s0100blm18a-1012019.pdf, ComponentLink3URL=https://datasheet.ciiva.com/1012/l0110s0100blm18a-1012019.pdf, ComponentLink4Description=https://datasheet.ciiva.com/1466/1756147-1466933.pdf, ComponentLink4URL=https://datasheet.ciiva.com/1466/1756147-1466933.pdf, ComponentLink5Description=https://datasheet.ciiva.com/19460/1844766-19460213.pdf, ComponentLink5URL=https://datasheet.ciiva.com/19460/1844766-19460213.pdf, ComponentLink6Description=https://datasheet.ciiva.com/1466/1756147-1466934.pdf, ComponentLink6URL=https://datasheet.ciiva.com/1466/1756147-1466934.pdf, ComponentLink7Description=https://datasheet.ciiva.com/16210/l0110s0100blm18a-16210006.pdf, ComponentLink7URL=https://datasheet.ciiva.com/16210/l0110s0100blm18a-16210006.pdf, ComponentLink8Description=https://datasheet.ciiva.com/3081/l0110s0100blm18a-3081613.pdf, ComponentLink8URL=https://datasheet.ciiva.com/3081/l0110s0100blm18a-3081613.pdf, ComponentLink9Description=https://datasheet.ciiva.com/29347/442309-da-01-en-chip-drossel-0603-600r-500ma-1-6x0-8mm-29347900.pdf, ComponentLink9URL=https://datasheet.ciiva.com/29347/442309-da-01-en-chip-drossel-0603-600r-500ma-1-6x0-8mm-29347900.pdf, ComponentLink10Description=https://datasheet.ciiva.com/41449/001172228-da-01-en-drossel-0603-600r-1-6x0-8mm-4000st-41449517.pdf, ComponentLink10URL=https://datasheet.ciiva.com/41449/001172228-da-01-en-drossel-0603-600r-1-6x0-8mm-4000st-41449517.pdf, Core Material=Ferrite, DC Current=500mA, Depth=0.8mm, Height=0.8mm, Impedance=600R, Lead Free="Lead Free", Length=1.6mm, Material=Steel,Ferrite, Max Current Rating=500mA, Max DC Current=500mA, Military Standard=Not, Number of Circuits=1, Number of Lines=1, Number of Pins=2, Packaging="Tape and Reel", Pricing 1="4000=0.02096, 8000=0.019, 12000=0.01834, 28000=0.01703, 100000=0.01683 (USD)", Radiation Hardening=No, REACH SVHC="No SVHC", Shielding=Unshielded, Stock 1=432000, Supplier 1=Digi-Key, Termination=SMD/SMT, Test Frequency=100MHz, Weight=7.1E-05oz, Width=0.8mm
FB2 FB3 FB4 FB5: Case/Package=0603, Case Code (Metric)=1608, Current Rating=1A, DC Resistance (DCR)=200mR, Manufacturer=Murata, Manufacturer Part Number=BLM18PG471SN1D, Max Operating Temperature=125°C, Min Operating Temperature=-55°C, Package Quantity=1, Supplier Part Number 1=490-5223-2-ND, Test Frequency=100MHz, Tolerance=25%, Case Code (Imperial)=0603, ComponentLink1Description=https://datasheet.ciiva.com/11800/0900766b81275ca5-11800885.pdf, ComponentLink1URL=https://datasheet.ciiva.com/11800/0900766b81275ca5-11800885.pdf, ComponentLink2Description=https://datasheet.ciiva.com/16331/l0110s0100blm18p-16331542.pdf, ComponentLink2URL=https://datasheet.ciiva.com/16331/l0110s0100blm18p-16331542.pdf, ComponentLink3Description=https://datasheet.ciiva.com/8021/1740433-8021497.pdf, ComponentLink3URL=https://datasheet.ciiva.com/8021/1740433-8021497.pdf, ComponentLink4Description=https://datasheet.ciiva.com/6212/l0110s0100blm18p-6212506.pdf, ComponentLink4URL=https://datasheet.ciiva.com/6212/l0110s0100blm18p-6212506.pdf, ComponentLink5Description=https://datasheet.ciiva.com/8021/1740433-8021498.pdf, ComponentLink5URL=https://datasheet.ciiva.com/8021/1740433-8021498.pdf, ComponentLink6Description=https://datasheet.ciiva.com/6212/l0110s0100blm18p-6212508.pdf, ComponentLink6URL=https://datasheet.ciiva.com/6212/l0110s0100blm18p-6212508.pdf, ComponentLink7Description=https://datasheet.ciiva.com/14122/blm-series-eng-tds-14122876.pdf, ComponentLink7URL=https://datasheet.ciiva.com/14122/blm-series-eng-tds-14122876.pdf, ComponentLink8Description=https://datasheet.ciiva.com/6212/l0110s0100blm18p-6212509.pdf, ComponentLink8URL=https://datasheet.ciiva.com/6212/l0110s0100blm18p-6212509.pdf, ComponentLink9Description=https://datasheet.ciiva.com/8508/l0110s0100blm18p-8508303.pdf, ComponentLink9URL=https://datasheet.ciiva.com/8508/l0110s0100blm18p-8508303.pdf, Core Material=Ferrite, DC Current=1A, Depth=0.8mm, Height=0.8mm, Impedance=470R, Lead Free="Lead Free", Length=1.6mm, Material=Steel,Ferrite, Max Current Rating=1A, Max DC Current=1A, Military Standard=Not, Number of Circuits=1, Number of Lines=1, Number of Pins=2, Packaging="Tape and Reel", Pricing 1="4000=0.02208, 8000=0.02001, 12000=0.01932, 28000=0.01794, 100000=0.01773 (USD)", Radiation Hardening=No, REACH SVHC="No SVHC", Resistance=200mR, Stock 1=328000, Supplier 1=Digi-Key, Termination=SMD/SMT, Width=0.8mm
J1 J2 J3 J5 J6: "3 Position terminal block"
J7 J8: "2.54mm Terminal Connector"
J9: library part 10103594-0001LF
L1: Case/Package=0402, Case Code (Metric)=1005, Current Rating=120mA, DC Resistance (DCR)=2.52R, Inductance=100nh, Inductance Tolerance=5%, Manufacturer=Murata, Manufacturer Part Number=LQW15ANR10J00D, Max Operating Temperature=125°C, Min Operating Temperature=-55°C, Package Quantity=10000, Self Resonant Frequency=1.5GHz, Supplier Part Number 1=490-4090-2-ND, Test Frequency=100MHz, Case Code (Imperial)=0402, ComponentLink1Description=https://datasheet.ciiva.com/18088/getdatasheetpartid-55782-18088805.pdf, ComponentLink1URL=https://datasheet.ciiva.com/18088/getdatasheetpartid-55782-18088805.pdf, ComponentLink2Description=https://datasheet.ciiva.com/17247/l0075s0080lqw15a-00-17247734.pdf, ComponentLink2URL=https://datasheet.ciiva.com/17247/l0075s0080lqw15a-00-17247734.pdf, ComponentLink3Description=https://datasheet.ciiva.com/16293/l0075s0080lqw15a-00-16293049.pdf, ComponentLink3URL=https://datasheet.ciiva.com/16293/l0075s0080lqw15a-00-16293049.pdf, ComponentLink4Description=https://datasheet.ciiva.com/4977/product-4977354.pdf, ComponentLink4URL=https://datasheet.ciiva.com/4977/product-4977354.pdf, ComponentLink5Description=https://datasheet.ciiva.com/1042/l0075s0080lqw15a-00-1042204.pdf, ComponentLink5URL=https://datasheet.ciiva.com/1042/l0075s0080lqw15a-00-1042204.pdf, ComponentLink6Description=https://datasheet.ciiva.com/1042/l0075s0080lqw15a-00-1042205.pdf, ComponentLink6URL=https://datasheet.ciiva.com/1042/l0075s0080lqw15a-00-1042205.pdf, ComponentLink7Description=https://datasheet.ciiva.com/8507/l0075s0080lqw15a-00-8507421.pdf, ComponentLink7URL=https://datasheet.ciiva.com/8507/l0075s0080lqw15a-00-8507421.pdf, ComponentLink8Description=https://datasheet.ciiva.com/1042/l0075s0080lqw15a-00-1042206.pdf, ComponentLink8URL=https://datasheet.ciiva.com/1042/l0075s0080lqw15a-00-1042206.pdf, ComponentLink9Description=https://datasheet.ciiva.com/11799/0900766b8090d800-11799038.pdf, ComponentLink9URL=https://datasheet.ciiva.com/11799/0900766b8090d800-11799038.pdf, Core Material=Ferrite,Air, DC Current=120mA, Depth=0.6mm, Height=0.5mm, Lead Free="Lead Free", Length=1mm, Max DC Current=120mA, Military Standard=Not, Mount="Surface Mount", Number of Pins=2, Packaging="Tape and Reel", Pricing 1="10000=0.048, 30000=0.0465, 50000=0.045, 100000=0.0435 (USD)", Radiation Hardening=No, REACH SVHC="No SVHC", Shielding=Unshielded, Stock 1=160000, Supplier 1=Digi-Key, Termination=SMD/SMT, Tolerance=5%, Weight=2.8E-05oz, Width=0.5mm
L2: Case/Package=0402, Case Code (Metric)=1005, Current Rating=300mA, DC Resistance (DCR)=240mR, Inductance=8.2nh, Manufacturer=Murata, Manufacturer Part Number=LQG15HS8N2J02D, Max Operating Temperature=125°C, Min Operating Temperature=-55°C, Package Quantity=10000, Self Resonant Frequency=3.7GHz, Test Frequency=100MHz, Tolerance=5%, Case Code (Imperial)=0402, ComponentLink1Description=https://datasheet.ciiva.com/1038/l0075s0083lqg15hs-1038112.pdf, ComponentLink1URL=https://datasheet.ciiva.com/1038/l0075s0083lqg15hs-1038112.pdf, ComponentLink2Description=https://datasheet.ciiva.com/1038/l0075s0083lqg15hs-1038113.pdf, ComponentLink2URL=https://datasheet.ciiva.com/1038/l0075s0083lqg15hs-1038113.pdf, ComponentLink3Description=https://datasheet.ciiva.com/1038/l0075s0083lqg15hs-1038114.pdf, ComponentLink3URL=https://datasheet.ciiva.com/1038/l0075s0083lqg15hs-1038114.pdf, ComponentLink4Description=https://datasheet.ciiva.com/16208/l0075s0083lqg15hs-16208342.pdf, ComponentLink4URL=https://datasheet.ciiva.com/16208/l0075s0083lqg15hs-16208342.pdf, ComponentLink5Description=https://datasheet.ciiva.com/11799/0900766b8090d685-11799047.pdf, ComponentLink5URL=https://datasheet.ciiva.com/11799/0900766b8090d685-11799047.pdf, ComponentLink6Description=https://datasheet.ciiva.com/17247/l0075s0083lqg15hs-17247128.pdf, ComponentLink6URL=https://datasheet.ciiva.com/17247/l0075s0083lqg15hs-17247128.pdf, ComponentLink7Description=https://datasheet.ciiva.com/8510/l0075s0083lqg15hs-8510877.pdf, ComponentLink7URL=https://datasheet.ciiva.com/8510/l0075s0083lqg15hs-8510877.pdf, Core Material=Air, DC Current=300mA, Depth=0.55mm, Height=0.5mm, Height - Seated (Max)=0.022inch, Lead Free="Lead Free", Length=1mm, Max DC Current=300mA, Military Standard=Not, Mount="Surface Mount", Packaging="Tape and Reel", Pricing 1="2000=0.0218 (USD)", Q Factor=8, Radiation Hardening=No, Shielding=Unshielded, Stock 1=0, Supplier 1="Future Electronics", Supplier Part Number 1=LQG15HS8N2J02D, Termination=SMD/SMT, Weight=2.3E-05oz, Width=0.02inch
L3 L4: Case/Package=0402, Case Code (Metric)=1005, Current Rating=540mA, DC Resistance (DCR)=140mR, Inductance=8.2nh, Inductance Tolerance=2%, Manufacturer=Murata, Manufacturer Part Number=LQW15AN8N2G00D, Max Operating Temperature=125°C, Min Operating Temperature=-55°C, Package Quantity=10000, Self Resonant Frequency=5.5GHz, Supplier Part Number 1=490-6849-2-ND, Test Frequency=100MHz, Case Code (Imperial)=0402, ComponentLink1Description=https://datasheet.ciiva.com/17278/l0075s0080lqw15a-00-17278341.pdf, ComponentLink1URL=https://datasheet.ciiva.com/17278/l0075s0080lqw15a-00-17278341.pdf, ComponentLink2Description=https://datasheet.ciiva.com/11799/0900766b8090d800-11799384.pdf, ComponentLink2URL=https://datasheet.ciiva.com/11799/0900766b8090d800-11799384.pdf, ComponentLink3Description=https://datasheet.ciiva.com/16455/l0075s0080lqw15a-00-16455832.pdf, ComponentLink3URL=https://datasheet.ciiva.com/16455/l0075s0080lqw15a-00-16455832.pdf, Core Material=Ferrite,Air, DC Current=540mA, Depth=0.7mm, Height=0.5mm, Lead Free="Lead Free", Length=1mm, Max DC Current=540mA, Military Standard=Not, Mount="Surface Mount", Number of Pins=2, Packaging="Tape and Reel", Pricing 1="10000=0.0528, 30000=0.05115, 50000=0.0495, 100000=0.04785 (USD)", Q Factor=25, Radiation Hardening=No, REACH SVHC="No SVHC", Shielding=Unshielded, Stock 1=60000, Supplier 1=Digi-Key, Termination=SMD/SMT, Tolerance=2%, Weight=2.8E-05oz, Width=0.02inch
Q1: "CRYSTAL 12.8000MHZ 10PF SMD", Part No=ABM3B-12.800MHZ-10-1-U-T